# Altium PCB imbuelight_move_detection — panel.PcbDoc
Units mm, origin at the board's own origin, x right, y up, seen from the top; angles counter-clockwise.
Board outline 100 x 100 mm, 2 copper layers (Top Layer, Bottom Layer), stack 0.97 mm thick; 4 components, 14 nets, 8 pads, 0 vias.
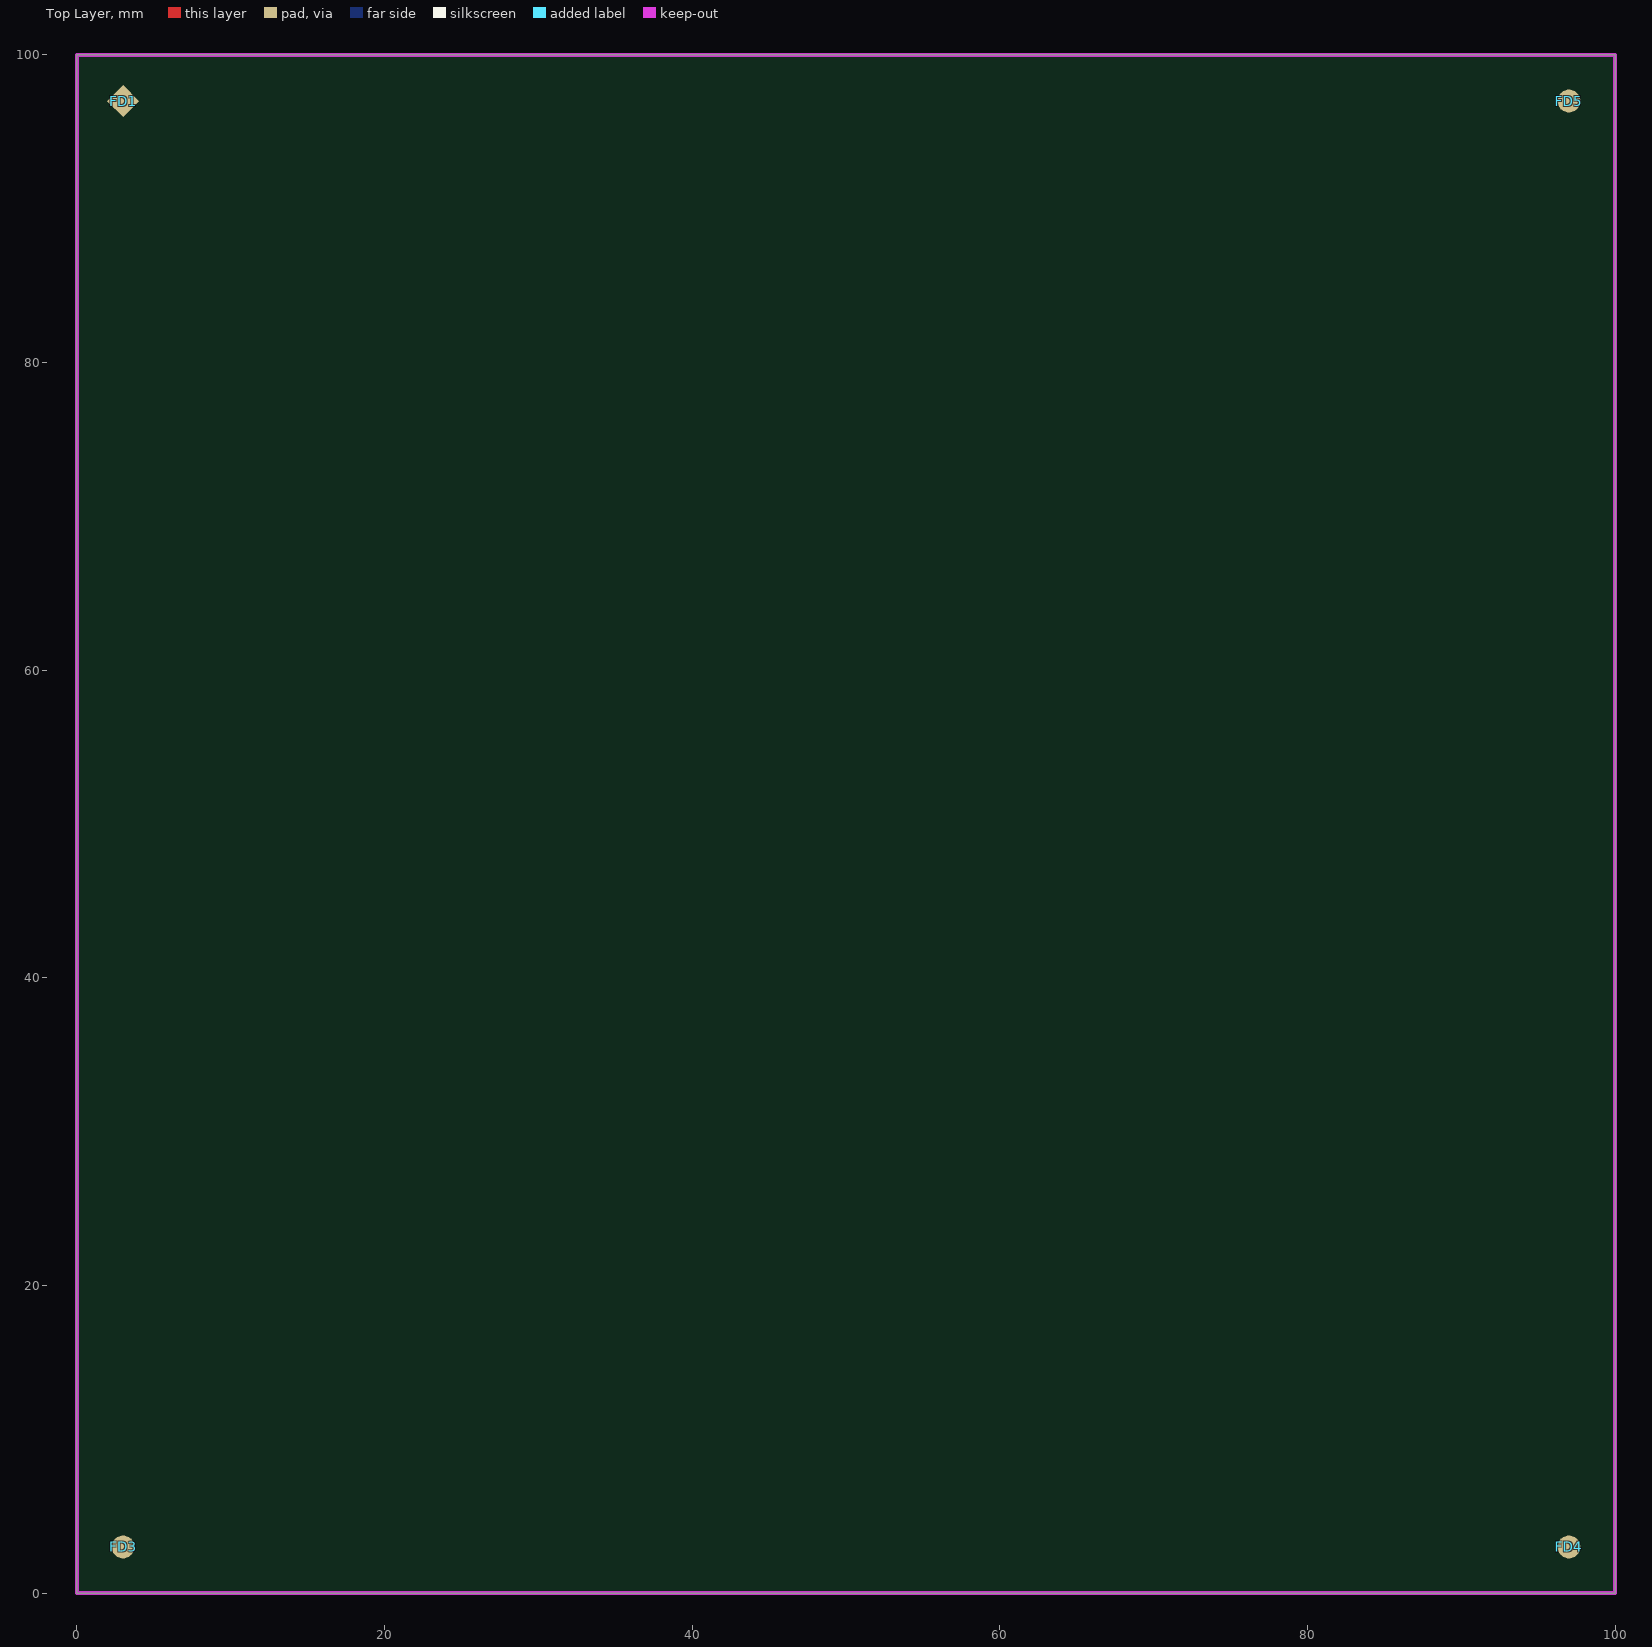
[diagram p0: Top Layer view]
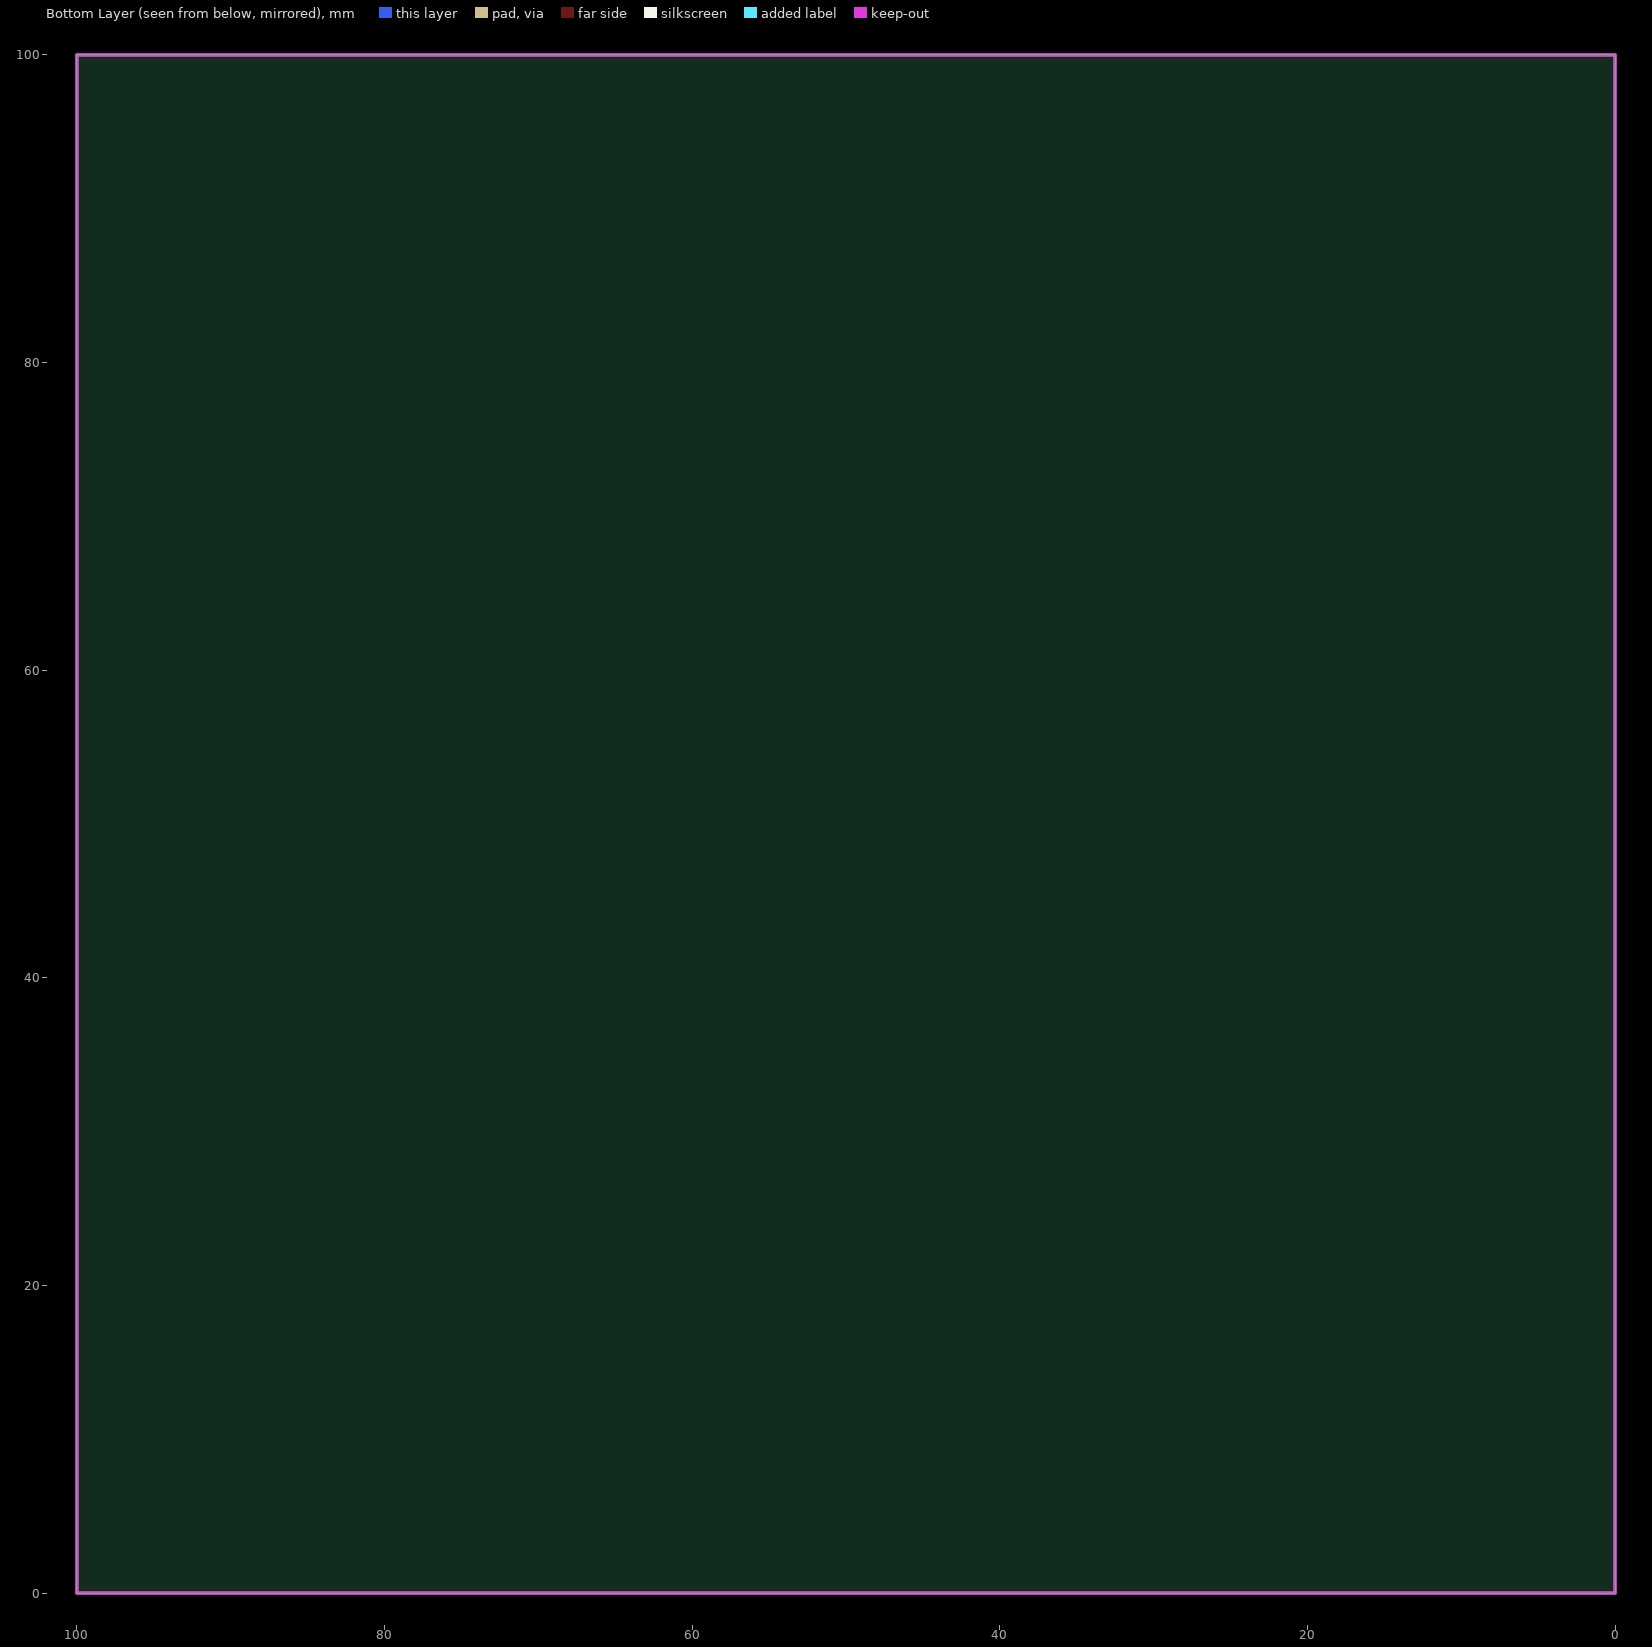
[diagram p1: Bottom Layer view, seen from below]

## Layer stack, top to bottom
Top Solder: solder mask 0.0102, Solder Resist, Dk 3.5
Top Layer: signal copper 0.035
Dielectric 1: dielectric 0.9, FR-4, Dk 4.8
Bottom Layer: signal copper 0.035
Bottom Solder: solder mask 0.0102, Solder Resist, Dk 3.5

## Board outline
0,0 0,100 100,100 100,0

## Design rules (kind name [scope] priority, off if disabled: settings)
Clearance [All] p1: gap=0.203 ignorepadtopadclearanceinfootprint=FALSE
HoleSize [All] p1: absolutevalues=TRUE maxlimit=7.62 minlimit=0.025 maxpercent=80.000 minpercent=20.000
MinimumSolderMaskSliver [All] p1: minsoldermaskwidth=0.025
PlaneConnect [All] p1: planeconnectstyle=Direct reliefexpansion=0.508 reliefentries=4 reliefconductorwidth=0.254 reliefairgap=0.254
PolygonConnect [All] p1: thpad.connectstyle=Relief thpad.reliefconductorwidth=0.508 thpad.reliefentries=4 thpad.polygonreliefangle="90 Angle" thpad.airgapwidth=0.381 smdpad.connectstyle=Relief smdpad.reliefconductorwidth=0.508 smdpad.reliefentries=4 smdpad.polygonreliefangle="90 Angle" smdpad.airgapwidth=0.381 via.connectstyle=Direct via.reliefconductorwidth=0.508 via.reliefentries=4 via.polygonreliefangle="90 Angle" via.airgapwidth=0.254
RoutingVias [All] p1: holewidth=0.2 width=0.4 viastyle="Through Hole" minholewidth=0.2 minwidth=0.4 maxholewidth=0.5 maxwidth=1
SilkToSilkClearance [All] p1: silktosilkclearance=0
SilkToSolderMaskClearance [IsPad] p1: minsilkscreentomaskgap=0.003 clearancetoexposedcopper=TRUE
SolderMaskExpansion [All] p1: expansion=0.102 istentingtop=FALSE
Width [All] p1: maxlimit=4 minlimit=0.254 preferedwidth=0.254 minimp=50.000000 maximp=50.000000 favimp=50.000000
25 further rules are at their usual default settings.

## Components (designator, comment, footprint, x,y, rotation, side; value= is the part's Value field where it differs from the comment)
FD1 "Fiducial - Cross" FIDUCIAL_T_SQ 3,97 r0 top
FD3 "Fiducial - Round" FIDUCIAL_B_RND 3,3 r180 bottom
FD4 "Fiducial - Round" FIDUCIAL_B_RND 97,3 r180 bottom (schematic designator FD3)
FD5 "Fiducial - Round" FIDUCIAL_B_RND 97,97 r180 bottom (schematic designator FD3)

## Footprints (in the part's own frame and the unit in brackets; to place one, negate y for a bottom-side part, rotate by r counter-clockwise, add the part's x,y. Pads: shape width x height; smd on the part's side, far side on the other; paste and mask are expansions set on the pad)
FIDUCIAL_B_RND [mm] "FIDUCIAL ROUND"
  round 1.5 smd far side: ""(0,0)
  round 2.5 on Top Solder: ""(0,0)
FIDUCIAL_T_SQ [mm] "FIDUCIAL CROSS"
  rect 1.5x1.5 smd rot 135: ""(0,0)
  rect 2.5x2.5 on Top Solder rot 135: ""(0,0)

## Part data
FD1: library part FIDUCIAL_T_SQ, "Fiducial - Cross 1.5mm Top-Bottom"
FD3 FD4 FD5: library part FIDUCIAL_B_RND, "Fiducial - Round 1.5mm Top-Bottom"

## Nets (pads, with @x,y where several pads share a name; then routed paths per layer and width w, separated by ;. In a path a pad name is that pad's centre, name@x,y a point inside that pad or via, vN(x,y) a via of type N, cw(c..) or ccw(c..) an arc to the next point about the centre after c; other vN are vias at no path point)
3V3: 
GND: 
I2C_SCL: 
I2C_SDA: 
NetD1_A: 
NetD3_A: 
NetD3_K: 
SENS_IO: 
SENS_XSHUT: 
SIGNAL: 
SIGNAL_MCU: 
SWD_CLK: 
SWD_DIO: 
VIN: 
pads on no net: FD1. FD3. FD4. FD5.

## Keep-outs
Keep-Out Layer:
  the board outline again, w0.254

## Panel: embedded boards
"imbuelight_move_detection.PcbDoc" at 3.111,2.935, 3 rows x 3 columns, spacing 32 x 32, rotation 0